# Altium PCB isa_svga.PcbDoc (part 1 of 2)
Units mm, origin at the board's own origin, x right, y up, seen from the top; angles counter-clockwise.
Board outline 104.14 x 87.63 mm, 2 copper layers (Front, Back); 62 components, 153 nets, 436 pads, 95 vias.
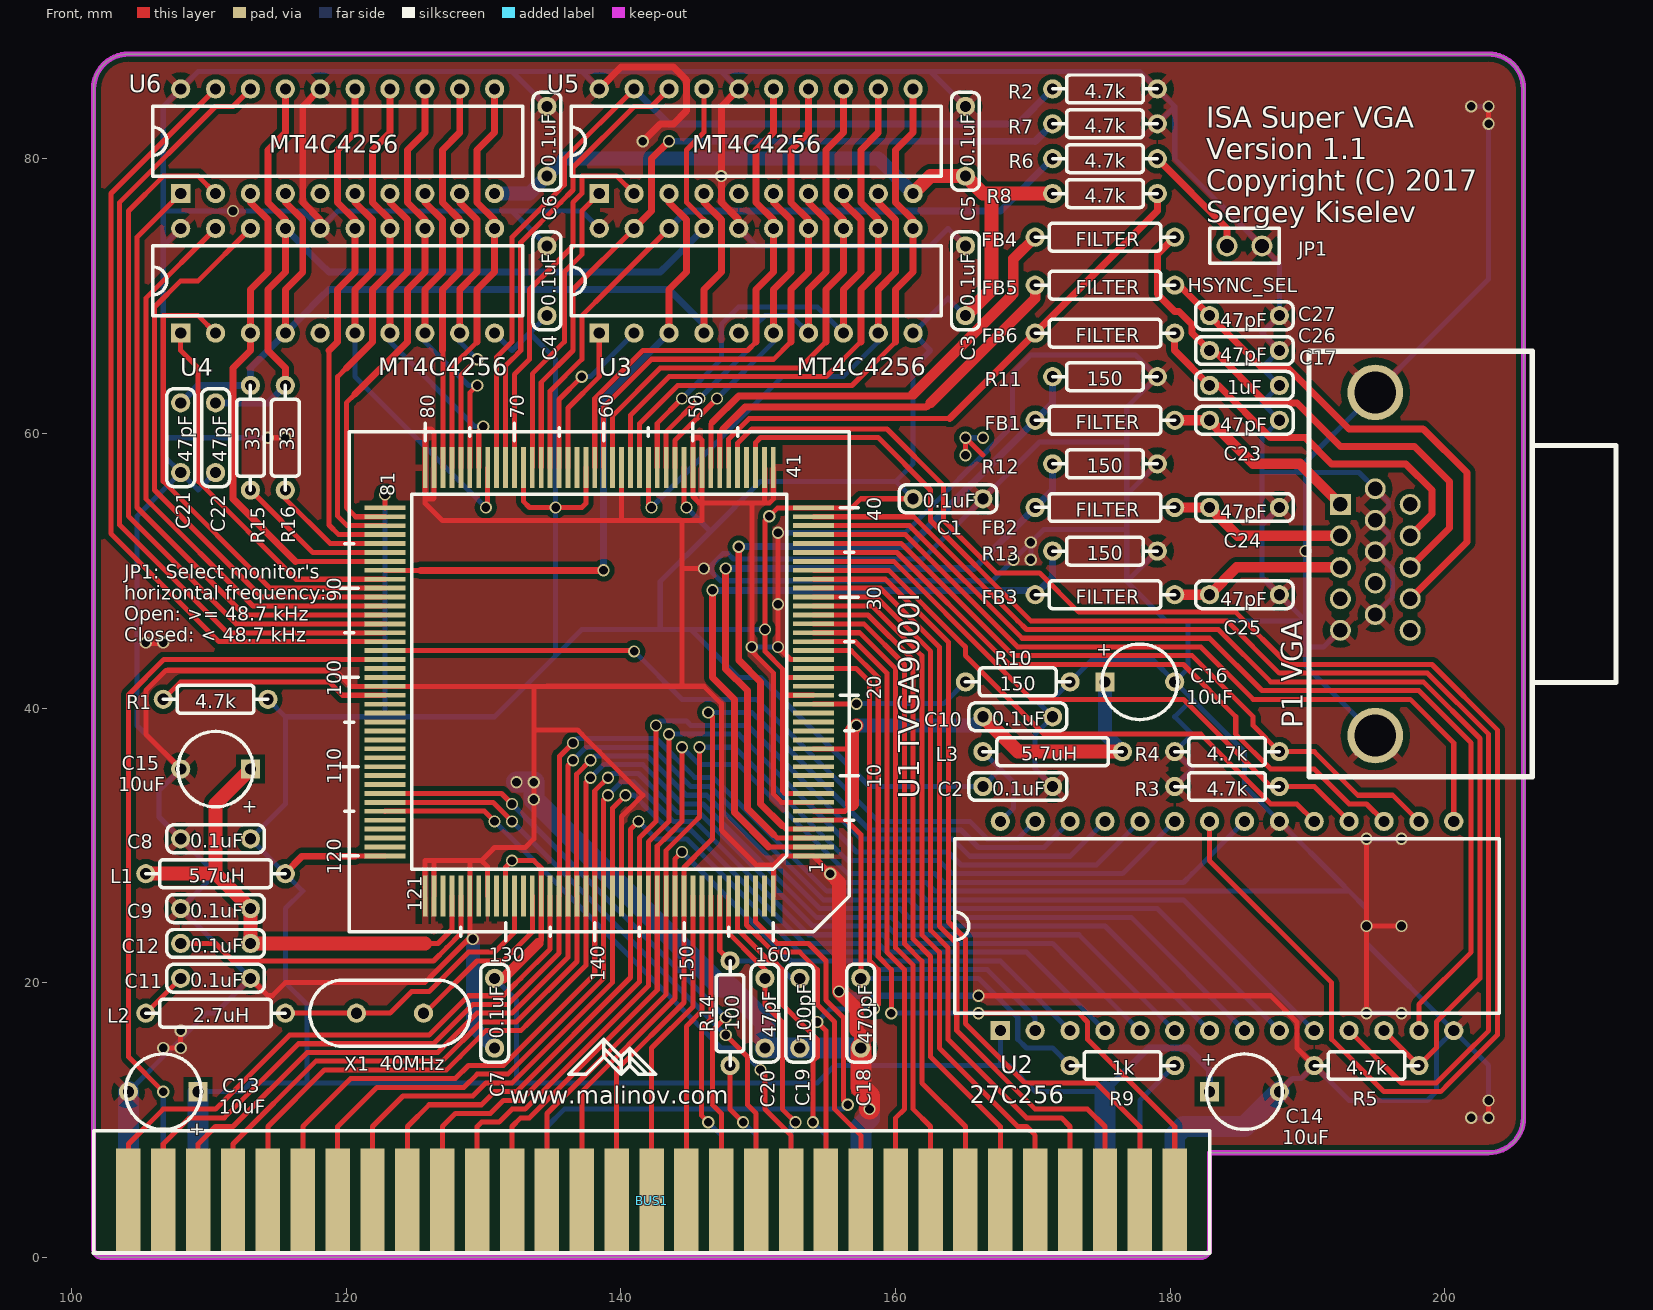
[diagram p0: Front view]
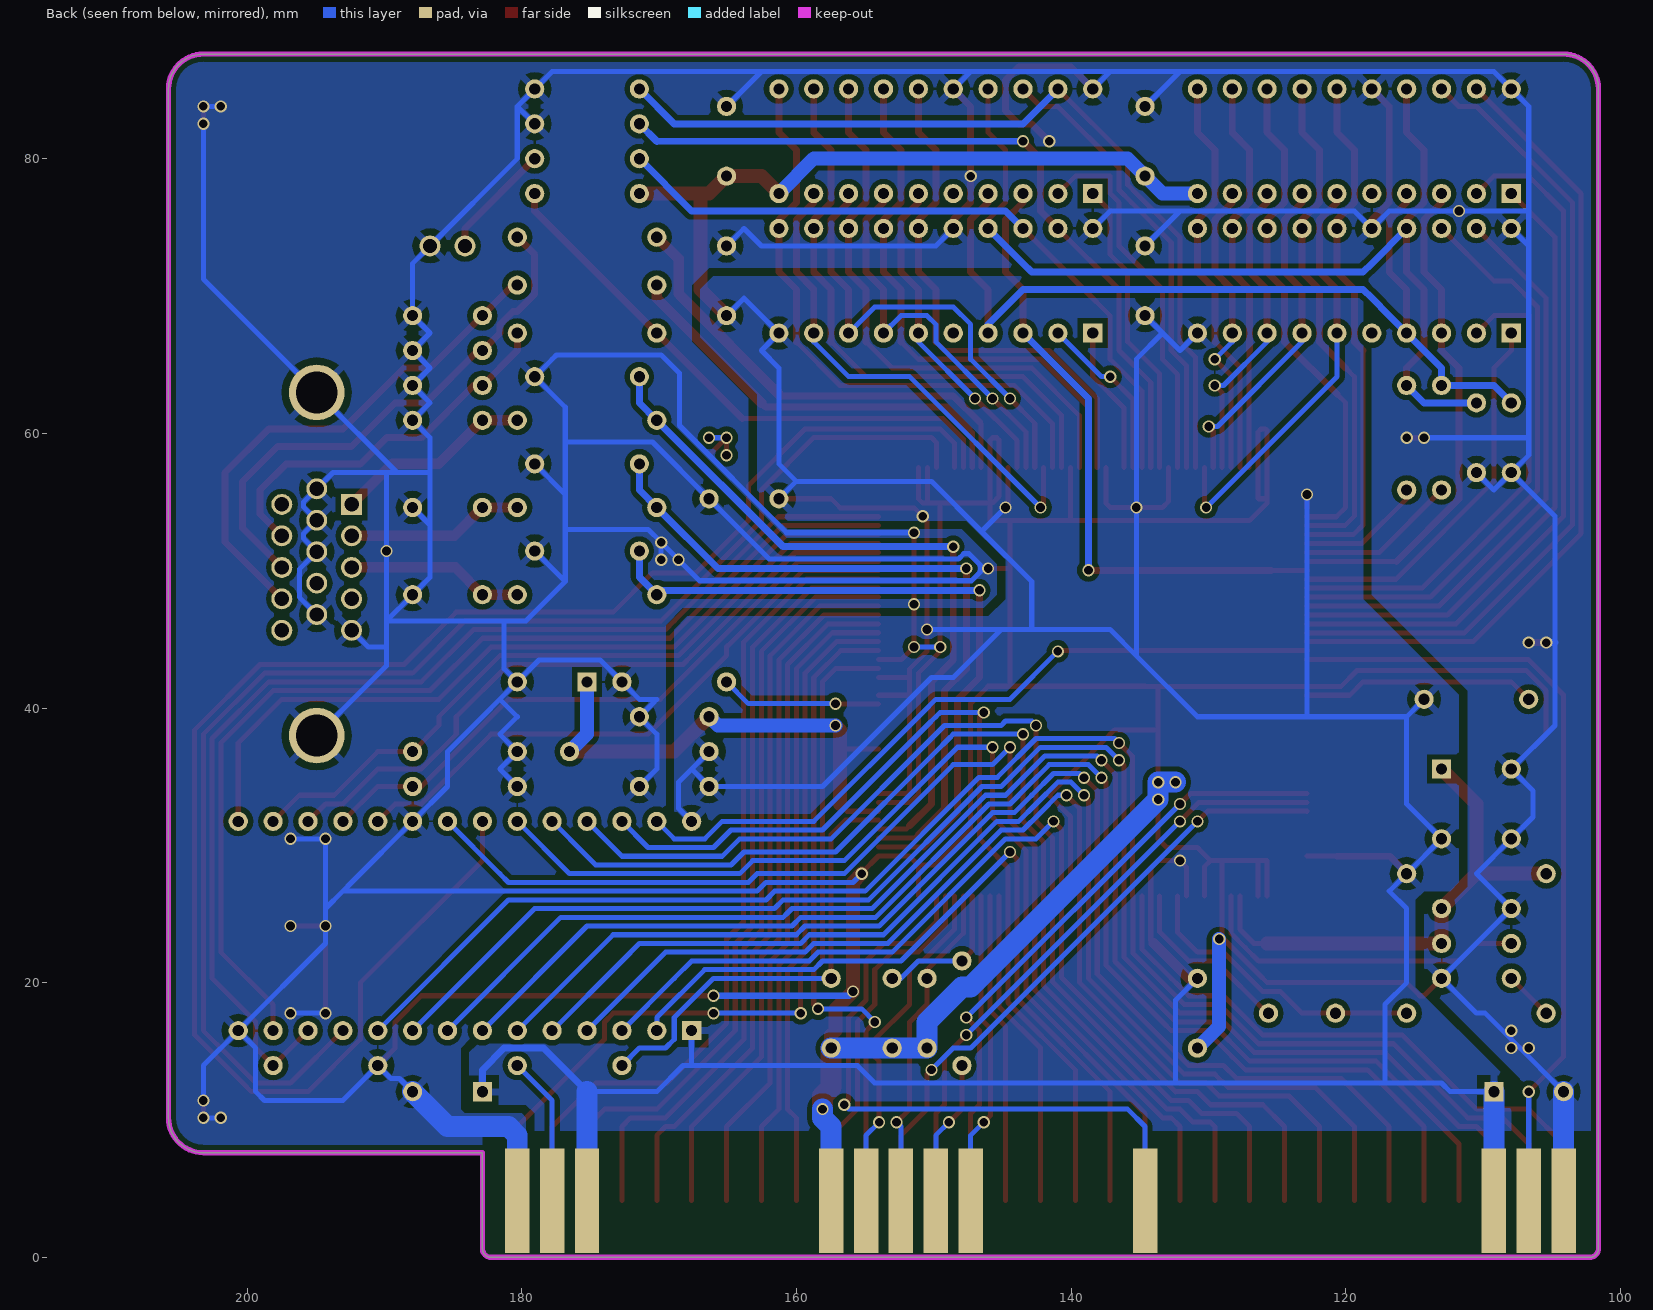
[diagram p1: Back view, seen from below]

## Layer stack, top to bottom
F.Mask: solder mask 0.0102, Solder Resist, Dk 3.5
Front: signal copper 0.0356
Dielectric 1: dielectric 0.32, FR-4, Dk 4.8
Back: signal copper 0.0356
B.Mask: solder mask 0.0102, Solder Resist, Dk 3.5

## Board outline
101.6,0.635 101.6,85.09 cw(c104.14,85.09) 203.2,87.63 cw(c203.2,85.09) 205.74,85.09 205.74,10.16 cw(c203.2,10.16) 203.2,7.62 182.88,7.62 182.88,0.635 cw(c182.245,0.635) 182.245,0 102.235,0 cw(c102.235,0.635) 101.6,0.635

## Design rules (kind name [scope] priority, off if disabled: settings)
Clearance "Clearence 0.37846_Polygon" [InNamedPolygon('Front-GND') OR InNamedPolygon('Back-VCC') OR InNamedPolygon('Back-GND')] p1: gap=0.378 ignorepadtopadclearanceinfootprint=FALSE
Clearance "Clearence 0.254_NetClass" [InNetClass('Default') OR InNetClass('Power')] p2: gap=0.254 ignorepadtopadclearanceinfootprint=FALSE
HoleSize "Hole Size (Default)" [All] p1: absolutevalues=TRUE maxlimit=10 minlimit=0.508 maxpercent=80.000 minpercent=20.000
MinimumSolderMaskSliver [All] p1: minsoldermaskwidth=0
PolygonConnect Polygon_Back-GND_ConnectDirect [IsNamedPolygon('Back-GND') vs IsVia] p1: connectstyle=Direct reliefconductorwidth=0.254 reliefentries=4 polygonreliefangle="90 Angle" airgapwidth=0.254
PolygonConnect Polygon_Back-GND_ConnectRelief45 [IsNamedPolygon('Back-GND') vs (IsThruPin or IsSMTPin) and (PadShape_AllLayers = 'Round')] p2: connectstyle=Relief reliefconductorwidth=0.508 reliefentries=4 polygonreliefangle="45 Angle" airgapwidth=0.508
PolygonConnect Polygon_Back-GND_ConnectRelief90 [IsNamedPolygon('Back-GND') vs (IsThruPin or IsSMTPin) and (PadShape_AllLayers <> 'Round')] p3: connectstyle=Relief reliefconductorwidth=0.508 reliefentries=4 polygonreliefangle="90 Angle" airgapwidth=0.508
PolygonConnect Polygon_Back-VCC_ConnectDirect [IsNamedPolygon('Back-VCC') vs IsVia] p4: connectstyle=Direct reliefconductorwidth=0.254 reliefentries=4 polygonreliefangle="90 Angle" airgapwidth=0.254
PolygonConnect Polygon_Back-VCC_ConnectRelief45 [IsNamedPolygon('Back-VCC') vs (IsThruPin or IsSMTPin) and (PadShape_AllLayers = 'Round')] p5: connectstyle=Relief reliefconductorwidth=0.508 reliefentries=4 polygonreliefangle="45 Angle" airgapwidth=0.508
PolygonConnect Polygon_Back-VCC_ConnectRelief90 [IsNamedPolygon('Back-VCC') vs (IsThruPin or IsSMTPin) and (PadShape_AllLayers <> 'Round')] p6: connectstyle=Relief reliefconductorwidth=0.508 reliefentries=4 polygonreliefangle="90 Angle" airgapwidth=0.508
PolygonConnect Polygon_Front-GND_ConnectDirect [IsNamedPolygon('Front-GND') vs IsVia] p7: connectstyle=Direct reliefconductorwidth=0.254 reliefentries=4 polygonreliefangle="90 Angle" airgapwidth=0.254
PolygonConnect Polygon_Front-GND_ConnectRelief45 [IsNamedPolygon('Front-GND') vs (IsThruPin or IsSMTPin) and (PadShape_AllLayers = 'Round')] p8: connectstyle=Relief reliefconductorwidth=0.508 reliefentries=4 polygonreliefangle="45 Angle" airgapwidth=0.508
PolygonConnect Polygon_Front-GND_ConnectRelief90 [IsNamedPolygon('Front-GND') vs (IsThruPin or IsSMTPin) and (PadShape_AllLayers <> 'Round')] p9: connectstyle=Relief reliefconductorwidth=0.508 reliefentries=4 polygonreliefangle="90 Angle" airgapwidth=0.508
RoutingVias [All] p1: holewidth=0.711 width=1.27 viastyle="Through Hole" minholewidth=0.711 minwidth=1.27 maxholewidth=0.711 maxwidth=1.27
SilkToSilkClearance [All] p1: silktosilkclearance=0
SilkToSolderMaskClearance [IsPad] p1: minsilkscreentomaskgap=0 clearancetoexposedcopper=TRUE
SolderMaskExpansion [All] p1: expansion=0.102 istentingtop=FALSE
Width [All] p1: maxlimit=10 minlimit=0.203 preferedwidth=0.368 minimp=50.000000 maximp=50.000000 favimp=50.000000
26 further rules are at their usual default settings.

## Classes and differential pairs
net class Default: A0 A1 A2 A3 A4 A5 A6 A7 A8 A9 A10 A11 A12 A13 A14 A15 A16 A17 A18 A19 AEN AVDD1 AVDD2 B BLUE C\A\S\ D0 D1 D2 D3 D4 D5 D6 D7 G GND GREEN HSYNC I\O\R\ I\O\W\ IOCHRDY M\E\M\R\ M\E\M\W\ MAA0 MAA1 MAA2 MAA3 MAA4 MAA5 MAA6 MAA7 MAA8 MAB0 MAB1 MAB2 MAB3 MAB4 MAB5 MAB6 MAB7 MAB8 MD0 MD1 MD2 MD3 MD4 MD5 MD6 MD7 MD16 MD17 MD18 MD19 MD20 MD21 MD22 MD23 MONITOR N\M\I\ Net-(C11-Pad1) Net-(C12-Pad2) Net-(C17-Pad1) Net-(C18-Pad1) Net-(C19-Pad1) Net-(C26-Pad1) Net-(C27-Pad1) Net-(JP1-Pad1) Net-(L2-Pad2) Net-(P1-Pad4) Net-(P1-Pad9) Net-(P1-Pad11) Net-(P1-Pad15) Net-(R1-Pad1) Net-(R10-Pad1) Net-(R15-Pad1) Net-(R16-Pad1) Net-(U1-Pad9) Net-(U1-Pad10) Net-(U1-Pad11) Net-(U1-Pad12) Net-(U1-Pad14) Net-(U1-Pad15) Net-(U1-Pad16) Net-(U1-Pad17) Net-(U1-Pad20) Net-(U1-Pad44) Net-(U1-Pad63) Net-(U1-Pad99) Net-(U1-Pad100) Net-(U1-Pad103) Net-(U1-Pad104) Net-(U1-Pad105) Net-(U1-Pad106) Net-(U1-Pad107) Net-(U1-Pad108) Net-(U1-Pad109) Net-(U1-Pad110) Net-(U1-Pad111) Net-(U1-Pad112) Net-(U1-Pad116) Net-(U1-Pad117) Net-(U1-Pad118) Net-(U1-Pad119) Net-(U1-Pad123) Net-(U1-Pad127) Net-(U1-Pad129) Net-(U1-Pad132) Net-(U1-Pad133) Net-(U1-Pad159) Net-(U3-Pad5) Net-(U4-Pad5) Net-(U5-Pad5) Net-(U6-Pad5) OSC R R\A\S\ R\E\F\R\E\S\H\ R\O\M\C\S\ RED RESET RMD0 RMD1 RMD2 RMD3 RMD4 RMD5 RMD6 RMD7 ROMA0 VCC VSYNC W\E\0\ W\E\2\

## Components (designator, comment, footprint, x,y, rotation, side; value= is the part's Value field where it differs from the comment)
BUS1 "BUSPC_DEV" Conn_Bus_ISA8 142.24,4.127 r0 top
C1 "0.1uF" Cap_Cer_504 163.83,55.245 r0 top
C2 "0.1uF" Cap_Cer_504 168.91,34.29 r0 top
C3 "0.1uF" Cap_Cer_504 165.1,71.12 r90 top
C4 "0.1uF" Cap_Cer_504 134.62,71.12 r90 top
C5 "0.1uF" Cap_Cer_504 165.1,81.28 r90 top
C6 "0.1uF" Cap_Cer_504 134.62,81.28 r90 top
C7 "0.1uF" Cap_Cer_504 130.81,17.78 r270 top
C8 "0.1uF" Cap_Cer_504 110.49,30.48 r180 top
C9 "0.1uF" Cap_Cer_504 110.49,25.4 r180 top
C10 "0.1uF" Cap_Cer_504 168.91,39.37 r0 top
C11 "0.1uF" Cap_Cer_504 110.49,20.32 r0 top
C12 "0.1uF" Cap_Cer_504 110.49,22.86 r180 top
C13 "10uF" Cap_Tant_504 106.68,12.065 r180 top
C14 "10uF" Cap_Tant_504 185.42,12.065 r0 top
C15 "10uF" Cap_Tant_504 110.49,35.56 r180 top
C16 "10uF" Cap_Tant_504 177.8,41.91 r0 top
C17 "1uF" Cap_Cer_504 185.42,63.5 r0 top
C18 "470pF" Cap_Cer_504 157.48,17.78 r270 top
C19 "100pF" Cap_Cer_504 153.035,17.78 r270 top
C20 "47pF" Cap_Cer_504 150.495,17.78 r270 top
C21 "47pF" Cap_Cer_504 107.95,59.69 r270 top
C22 "47pF" Cap_Cer_504 110.49,59.69 r270 top
C23 "47pF" Cap_Cer_504 185.42,60.96 r0 top
C24 "47pF" Cap_Cer_504 185.42,54.61 r0 top
C25 "47pF" Cap_Cer_504 185.42,48.26 r0 top
C26 "47pF" Cap_Cer_504 185.42,66.04 r0 top
C27 "47pF" Cap_Cer_504 185.42,68.58 r0 top
FB1 "FILTER" Res_1016 175.26,60.96 r0 top
FB2 "FILTER" Res_1016 175.26,54.61 r0 top
FB3 "FILTER" Res_1016 175.26,48.26 r0 top
FB4 "FILTER" Res_1016 175.26,74.295 r180 top
FB5 "FILTER" Res_1016 175.26,70.802 r180 top
FB6 "FILTER" Res_1016 175.26,67.31 r180 top
JP1 "HSYNC_SEL" Conn_Pin_Header_2x1_Nokey 185.42,73.66 r0 top
L1 "5.7uH" Res_1016 110.49,27.94 r180 top
L2 "2.7uH" Res_1016 110.49,17.78 r0 top
L3 "5.7uH" Res_1016 171.45,36.83 r0 top
P1 "VGA" Conn_Dsub_DE15F 194.945,50.495 r270 top
R1 "4.7k" Res_762 110.49,40.64 r0 top
R2 "4.7k" Res_762 175.26,85.09 r0 top
R3 "4.7k" Res_762 184.15,34.29 r180 top
R4 "4.7k" Res_762 184.15,36.83 r180 top
R5 "4.7k" Res_762 194.31,13.97 r180 top
R6 "4.7k" Res_762 175.26,80.01 r0 top
R7 "4.7k" Res_762 175.26,82.55 r0 top
R8 "4.7k" Res_762 175.26,77.47 r180 top
R9 "1k" Res_762 176.53,13.97 r180 top
R10 "150" Res_762 168.91,41.91 r0 top
R11 "150" Res_762 175.26,64.135 r0 top
R12 "150" Res_762 175.26,57.785 r0 top
R13 "150" Res_762 175.26,51.435 r0 top
R14 "100" Res_762 147.955,17.78 r90 top
R15 "33" Res_762 113.03,59.69 r90 top
R16 "33" Res_762 115.57,59.69 r90 top
U1 "TVGA9000I" PQFP-160 138.43,41.91 r90 top
U2 "27C256" DIP28_600 184.15,24.13 r0 top
U3 "MT4C4256" DIP20_300 149.86,71.12 r0 top
U4 "MT4C4256" DIP20_300 119.38,71.12 r0 top
U5 "MT4C4256" DIP20_300 149.86,81.28 r0 top
U6 "MT4C4256" DIP20_300 119.38,81.28 r0 top
X1 "40MHz" Crystal_HC-49U_Vert 123.19,17.78 r180 top

## Footprints (in the part's own frame and the unit in brackets; to place one, negate y for a bottom-side part, rotate by r counter-clockwise, add the part's x,y. Pads: shape width x height; smd on the part's side, far side on the other; paste and mask are expansions set on the pad)
Cap_Cer_504 [mil]
  round 55 hole 32 paste-55 mask+10: 1(-100,0) 2(100,0)
  silkscreen extent -140,-40 140,40
Cap_Tant_504 [mil]
  rect 55x55 hole 32 paste-55 mask+10: 1(-100,0)
  round 55 hole 32 paste-55 mask+10: 2(100,0)
  silkscreen extent -108,-108 108,108
Conn_Bus_ISA8 [mil]
  rect 70x300 smd far side paste-300 mask+10: 1(1500,0) 2(1400,0) 3(1300,0) 10(600,0) 11(500,0) 12(400,0) 13(300,0) 14(200,0) 19(-300,0) 29(-1300,0) 30(-1400,0) 31(-1500,0)
  rect 70x300 smd paste-300 mask+10: 32(1500,0) 33(1400,0) 34(1300,0) 35(1200,0) 36(1100,0) 37(1000,0) 38(900,0) 39(800,0) 40(700,0) 41(600,0) 42(500,0) 43(400,0) 44(300,0) 45(200,0) 46(100,0) 47(0,0) 48(-100,0) 49(-200,0) 50(-300,0) 51(-400,0) 52(-500,0) 53(-600,0) 54(-700,0) 55(-800,0) 56(-900,0) 57(-1000,0) 58(-1100,0) 59(-1200,0) 60(-1300,0) 61(-1400,0) 62(-1500,0)
  silkscreen extent -1600,-150 1600,200
Conn_Dsub_DE15F [mil]
  rect 60x60 hole 41 paste-60 mask+10: 1(-170.9,-100)
  round 60 hole 41 paste-60 mask+10: 2(-80.7,-100) 3(9.8,-100) 4(100,-100) 5(190.2,-100) 6(-215.6,0) 7(-125.4,0) 8(-35.2,0) 9(54.9,0) 10(145.1,0) 11(-170.9,100) 12(-80.7,100) 13(9.8,100) 14(100,100) 15(190.2,100)
  round 159.4 hole 120.1 paste-159.4 mask+10: Un1(491.9,0) Un2(-491.9,0)
  silkscreen extent -610,-190 610,690
Conn_Pin_Header_2x1_Nokey [mil]
  rrect100% 60x60 hole 40 paste-60 mask+10: 1(-50,0)
  round 60 hole 40 paste-60 mask+10: 2(50,0)
  silkscreen extent -100,-50 100,50
Crystal_HC-49U_Vert [mil]
  round 55 hole 32 paste-55 mask+10: 1(-96.1,0) 2(96.1,0)
  silkscreen extent -230,-95 230,95
DIP20_300 [mil]
  rect 55x55 hole 32 paste-55 mask+10: 1(-450,-150)
  round 55 hole 32 paste-55 mask+10: 2(-350,-150) 3(-250,-150) 4(-150,-150) 5(-50,-150) 6(50,-150) 7(150,-150) 8(250,-150) 9(350,-150) 10(450,-150) 11(450,150) 12(350,150) 13(250,150) 14(150,150) 15(50,150) 16(-50,150) 17(-150,150) 18(-250,150) 19(-350,150) 20(-450,150)
  silkscreen extent -530,-100 530,100
DIP28_600 [mil]
  rect 55x55 hole 32 paste-55 mask+10: 1(-650,-300)
  round 55 hole 32 paste-55 mask+10: 2(-550,-300) 3(-450,-300) 4(-350,-300) 5(-250,-300) 6(-150,-300) 7(-50,-300) 8(50,-300) 9(150,-300) 10(250,-300) 11(350,-300) 12(450,-300) 13(550,-300) 14(650,-300) 15(650,300) 16(550,300) 17(450,300) 18(350,300) 19(250,300) 20(150,300) 21(50,300) 22(-50,300) 23(-150,300) 24(-250,300) 25(-350,300) 26(-450,300) 27(-550,300) 28(-650,300)
  silkscreen extent -780,-250 780,250
PQFP-160 [mil]
  rect 13.8x118.1 smd mask+10: 1(-499,-614.2) 2(-473.4,-614.2) 3(-447.8,-614.2) 4(-422.2,-614.2) 5(-396.6,-614.2) 6(-371,-614.2) 7(-345.4,-614.2) 8(-319.9,-614.2) 9(-294.3,-614.2) 10(-268.7,-614.2) 11(-243.1,-614.2) 12(-217.5,-614.2) 13(-191.9,-614.2) 14(-166.3,-614.2) 15(-140.7,-614.2) 16(-115.1,-614.2) 17(-89.5,-614.2) 18(-63.9,-614.2) 19(-38.4,-614.2) 20(-12.8,-614.2) 21(12.8,-614.2) 22(38.4,-614.2) 23(64,-614.2) 24(89.6,-614.2) 25(115.2,-614.2) 26(140.8,-614.2) 27(166.4,-614.2) 28(192,-614.2) 29(217.5,-614.2) 30(243.1,-614.2) 31(268.7,-614.2) 32(294.3,-614.2) 33(319.9,-614.2) 34(345.5,-614.2) 35(371.1,-614.2) 36(396.7,-614.2) 37(422.3,-614.2) 38(447.9,-614.2) 39(473.5,-614.2) 40(499,-614.2) 81(499,614.2) 82(473.4,614.2) 83(447.8,614.2) 84(422.2,614.2) 85(396.6,614.2) 86(371.1,614.2) 87(345.5,614.2) 88(319.9,614.2) 89(294.3,614.2) 90(268.7,614.2) 91(243.1,614.2) 92(217.5,614.2) 93(191.9,614.2) 94(166.3,614.2) 95(140.7,614.2) 96(115.2,614.2) 97(89.6,614.2) 98(64,614.2) 99(38.4,614.2) 100(12.8,614.2) 101(-12.8,614.2) 102(-38.4,614.2) 103(-64,614.2) 104(-89.6,614.2) 105(-115.2,614.2) 106(-140.8,614.2) 107(-166.3,614.2) 108(-191.9,614.2) 109(-217.5,614.2) 110(-243.1,614.2) 111(-268.7,614.2) 112(-294.3,614.2) 113(-319.9,614.2) 114(-345.5,614.2) 115(-371.1,614.2) 116(-396.7,614.2) 117(-422.2,614.2) 118(-447.8,614.2) 119(-473.4,614.2) 120(-499,614.2)
  rect 118.1x13.8 smd mask+10: 41(614.2,-499) 42(614.2,-473.4) 43(614.2,-447.8) 44(614.2,-422.2) 45(614.2,-396.7) 46(614.2,-371.1) 47(614.2,-345.5) 48(614.2,-319.9) 49(614.2,-294.3) 50(614.2,-268.7) 51(614.2,-243.1) 52(614.2,-217.5) 53(614.2,-191.9) 54(614.2,-166.3) 55(614.2,-140.8) 56(614.2,-115.2) 57(614.2,-89.6) 58(614.2,-64) 59(614.2,-38.4) 60(614.2,-12.8) 61(614.2,12.8) 62(614.2,38.4) 63(614.2,64) 64(614.2,89.6) 65(614.2,115.2) 66(614.2,140.8) 67(614.2,166.3) 68(614.2,191.9) 69(614.2,217.5) 70(614.2,243.1) 71(614.2,268.7) 72(614.2,294.3) 73(614.2,319.9) 74(614.2,345.5) 75(614.2,371.1) 76(614.2,396.7) 77(614.2,422.2) 78(614.2,447.8) 79(614.2,473.4) 80(614.2,499) 121(-614.2,499) 122(-614.2,473.4) 123(-614.2,447.8) 124(-614.2,422.2) 125(-614.2,396.7) 126(-614.2,371.1) 127(-614.2,345.5) 128(-614.2,319.9) 129(-614.2,294.3) 130(-614.2,268.7) 131(-614.2,243.1) 132(-614.2,217.5) 133(-614.2,191.9) 134(-614.2,166.3) 135(-614.2,140.8) 136(-614.2,115.2) 137(-614.2,89.6) 138(-614.2,64) 139(-614.2,38.4) 140(-614.2,12.8) 141(-614.2,-12.8) 142(-614.2,-38.4) 143(-614.2,-64) 144(-614.2,-89.6) 145(-614.2,-115.2) 146(-614.2,-140.7) 147(-614.2,-166.3) 148(-614.2,-191.9) 149(-614.2,-217.5) 150(-614.2,-243.1) 151(-614.2,-268.7) 152(-614.2,-294.3) 153(-614.2,-319.9) 154(-614.2,-345.5) 155(-614.2,-371.1) 156(-614.2,-396.6) 157(-614.2,-422.2) 158(-614.2,-447.8) 159(-614.2,-473.4) 160(-614.2,-499)
  silkscreen extent -742,-742 742,742
Res_762 [mil]
  round 55 hole 32 paste-55 mask+10: 1(-150,0) 2(150,0)
  silkscreen extent -150,-40 150,40
Res_1016 [mil]
  round 55 hole 32 paste-55 mask+10: 1(-200,0) 2(200,0)
  silkscreen extent -200,-40 200,40

## Part data
BUS1: library part Conn_Bus_ISA8, "ISA8 PCB edge connector"
C1 C2 C3 C4 C5 C6 C7 C8 C9 C10 C11 C12 C17 C18 C19 C20 C21 C22 C23 C24 C25 C26 C27: library part Cap_Cer_504, "Ceramic Capacitor 5.04mm"
C13 C14 C15 C16: library part Cap_Tant_504, "Tantalum Capacitor - 5.04mm"
FB1 FB2 FB3 FB4 FB5 FB6 L1 L2 L3: library part Res_1016, "Resistor 10.16mm between leads"
JP1: library part Conn_Pin_Header_2x1_Nokey, "Connector Pin Header 2x1 No Key"
P1: library part Conn_Dsub_DE15F, "Connector DE15 Female Right Angle Through Hole"
R1 R2 R3 R4 R5 R6 R7 R8 R9 R10 R11 R12 R13 R14 R15 R16: library part Res_762, "Resitance 3 pas"
U1: library part PQFP-160
U2: library part DIP28_600, "Module Dil 28 pins, pads ronds, e=600 mils"
U3 U4 U5 U6: library part DIP20_300, "20 pins DIL package, round pads"
X1: library part Crystal_HC-49U_Vert, "Quartz Crystal HC-49U Vertical"

## Via types
v1: diameter 0.889, hole 0.635, Front to Back, tented both sides, 95 vias

## Nets (pads, with @x,y where several pads share a name; then routed paths per layer and width w, separated by ;. In a path a pad name is that pad's centre, name@x,y a point inside that pad or via, vN(x,y) a via of type N, cw(c..) or ccw(c..) an arc to the next point about the centre after c; other vN are vias at no path point)
A0: BUS1.62 U1.135 | length 44.6
  Front w0.368: BUS1.62@104.14,4.127 104.14,8.255 106.68,10.795 110.49,10.795 115.887,16.192 125.412,16.192 126.047,16.192 128.905,19.05 131.445,19.05 132.08,19.685 132.715,20.32 134.854,22.459 134.854,24.447 U1.135@134.854,26.309
A1: BUS1.61 U1.136 U2.10 | length 120.2
  Front w0.368: BUS1.61@106.68,4.127 106.68,8.255 108.585,10.16 111.125,10.16 116.522,15.557 125.73,15.557 126.365,15.557 129.222,18.415 131.445,18.415 131.445,18.42 131.768,18.42 132.715,19.367 133.35,20.002 135.504,22.156 U1.136@135.504,26.309 ; 135.504,23.49 135.504,23.495 U1.136@135.504,26.309 ; v1(136.525,37.465) 135.572,36.512 135.524,36.512 135.524,34.242 135.524,26.309 U1.136@135.504,26.309
  Back w0.368: v1(136.525,37.465) 136.843,37.782 142.558,37.782 145.385,34.955 146.718,34.955 155.004,26.67 155.194,26.67 160.66,26.67 ; U2.10@190.5,16.51 180.975,26.035 162.232,26.035 162.232,26.03 161.607,26.655 161.607,26.665 161.607,26.67 160.66,26.67 ; 160.66,26.67 160.66,26.675 160.66,26.67
A2: BUS1.60 U1.137 U2.9 | length 111.9
  Front w0.368: BUS1.60@109.22,4.127 109.22,8.255 110.49,9.525 111.76,9.525 117.157,14.922 125.412,14.922 126.677,14.922 129.535,17.78 ; v1(136.525,36.195) 136.154,35.824 136.154,35.242 136.154,33.919 U1.137@136.154,26.309 136.154,24.447 136.154,21.854 132.08,17.78 129.535,17.78 ; 129.535,17.78 129.535,17.785 129.535,17.78
  Back w0.368: v1(136.525,36.195) 137.472,37.142 142.24,37.142 142.245,37.142 145.097,34.29 146.494,34.29 154.749,26.035 160.02,26.035 ; 179.08,25.395 179.075,25.4 179.07,25.4 ; U2.9@187.96,16.51 187.96,16.515 179.07,25.405 179.07,25.4 ; 160.02,26.035 160.338,26.035 ; 160.02,26.035 160.972,26.035 161.607,25.4 179.07,25.4 ; 160.338,26.035 160.338,26.03 160.338,26.035
A3: BUS1.59 U1.138 U2.8 | length 105.8
  Front w0.368: BUS1.59@111.76,4.127 111.76,8.255 111.76,8.26 117.79,14.29 127.003,14.29 129.857,17.145 130.493,17.145 130.493,17.15 132.403,17.15 136.804,21.552 136.804,21.907 136.804,22.86 U1.138@136.804,26.309 136.784,26.309 136.784,33.597 136.784,34.608 136.784,35.184 v1(137.795,36.195)
  Back w0.368: v1(137.795,36.195) 138.112,36.512 141.922,36.512 144.78,33.655 146.24,33.655 146.304,33.591 154.495,25.4 160.02,25.4 160.338,25.4 160.655,25.082 160.972,24.765 177.165,24.765 U2.8@185.42,16.51
A4: BUS1.58 U1.139 U2.7 | length 100.7
  Front w0.368: BUS1.58@114.3,4.127 114.3,9.525 118.427,13.652 127.317,13.652 128.27,14.605 130.175,16.51 132.715,16.51 133.35,17.145 137.455,21.25 137.455,21.907 U1.139@137.455,26.309 137.475,26.309 137.475,33.02 137.475,33.972 137.475,34.605 v1(137.795,34.925)
  Back w0.368: v1(137.795,34.925) 138.748,35.877 141.605,35.877 143.192,34.29 144.463,33.02 145.987,33.02 154.242,24.765 159.702,24.765 159.702,24.76 160.332,24.13 175.26,24.13 U2.7@182.88,16.51
A5: BUS1.57 U1.140 U2.6 | length 95.1
  Front w0.368: BUS1.57@116.84,4.127 116.84,9.525 120.332,13.018 127.953,13.018 128.905,13.97 131.445,13.97 138.105,20.63 138.105,22.225 U1.140@138.105,26.309 138.105,32.385 138.105,33.972 138.112,33.972 v1(139.065,34.925)
  Back w0.368: v1(139.065,34.925) 139.382,35.242 141.287,35.242 142.875,33.655 144.145,32.385 145.732,32.385 153.987,24.13 154.623,24.13 159.385,24.13 160.02,23.495 173.355,23.495 U2.6@180.34,16.51
A6: BUS1.56 U1.141 U2.5 | length 90
  Front w0.368: BUS1.56@119.38,4.127 119.38,9.525 122.237,12.383 128.588,12.383 129.54,13.335 129.54,13.34 131.768,13.34 138.755,20.328 U1.141@138.755,26.309 138.755,31.75 ; 138.755,32.393 138.755,32.385 138.755,31.75 ; v1(139.065,33.655) 138.755,33.345 138.755,33.337 138.755,31.75
  Back w0.368: v1(139.065,33.655) 140.017,34.608 140.97,34.608 142.558,33.02 143.827,31.75 145.415,31.75 153.67,23.495 154.305,23.495 154.94,23.495 159.067,23.495 159.702,22.86 171.45,22.86 172.72,21.59 U2.5@177.8,16.51
A7: BUS1.55 U1.142 U2.4 | length 83.3
  Front w0.368: BUS1.55@121.92,4.127 121.92,9.525 124.142,11.747 129.222,11.747 130.175,12.7 130.175,12.71 132.09,12.71 139.405,20.025 139.405,20.637 139.405,21.273 U1.142@139.405,26.309 139.405,31.75 139.405,32.067 ; 139.405,32.09 139.405,32.067 ; 139.405,32.408 139.405,32.385 ; v1(140.335,33.655) 139.405,32.725 139.405,32.385 ; 139.405,32.067 139.405,32.385
  Back w0.368: v1(140.335,33.655) 140.97,33.655 142.24,32.385 143.51,31.115 145.097,31.115 153.352,22.86 153.987,22.86 154.305,22.86 158.75,22.86 158.75,22.855 159.38,22.225 169.545,22.225 170.815,20.955 U2.4@175.26,16.51
A8: BUS1.54 U1.144 U2.3 | length 75.5
  Front w0.368: BUS1.54@124.46,4.127 124.46,9.525 126.047,11.112 129.857,11.112 130.81,12.065 132.398,12.065 ; v1(141.287,31.75) 140.706,31.168 140.706,29.21 U1.144@140.706,26.309 140.706,20.955 140.706,20.373 132.398,12.065 ; 132.398,12.065 132.398,12.06 132.398,12.065
  Back w0.368: v1(141.287,31.75) 142.558,30.48 144.78,30.48 153.035,22.225 153.67,22.225 158.433,22.225 159.067,21.59 167.64,21.59 168.91,20.32 U2.3@172.72,16.51
A9: BUS1.53 U1.145 U2.25 | length 81.2
  Front w0.368: BUS1.53@127,4.127 127,9.525 127.953,10.477 130.493,10.477 131.445,11.43 132.715,11.43 141.287,20.002 141.356,20.071 U1.145@141.356,26.309 141.356,28.892 141.356,30.549 142.558,31.75 142.558,38.1 142.558,38.417 v1(142.558,38.735)
  Back w0.368: v1(142.558,38.735) 142.875,39.052 144.78,39.052 145.097,38.735 149.225,38.735 150.177,37.782 157.48,30.48 164.147,30.48 165.417,29.21 172.72,29.21 173.355,29.845 U2.25@175.26,31.75
A10: BUS1.52 U1.146 U2.24 | length 80.6
  Front w0.368: BUS1.52@129.54,4.127 129.54,9.525 129.857,9.842 131.127,9.842 132.085,10.8 133.038,10.8 142.004,19.766 142.004,20.002 U1.146@142.004,26.309 142.004,29.845 142.004,30.244 143.51,31.75 143.51,37.465 v1(143.51,38.1)
  Back w0.368: v1(143.51,38.1) 148.59,38.1 148.907,37.782 149.86,36.83 157.162,29.527 163.83,29.527 164.782,28.575 174.625,28.575 175.26,29.21 U2.24@177.8,31.75
A11: BUS1.51 U1.147 U2.21 | length 85.4
  Front w0.368: BUS1.51@132.08,4.127 132.08,9.525 132.715,10.16 133.35,10.16 142.654,19.464 142.654,20.32 142.654,20.637 U1.147@142.654,26.309 142.654,29.845 142.654,29.942 143.51,30.797 144.463,31.75 v1(144.463,37.148)
  Back w0.368: v1(144.463,37.148) 145.732,35.877 148.59,35.877 156.528,27.94 161.29,27.94 162.877,27.94 163.512,27.305 180.975,27.305 181.61,27.94 U2.21@185.42,31.75
A12: BUS1.50 U1.148 U2.23 | length 77.6
  Front w0.368: BUS1.50@134.62,4.127 134.62,8.89 134.62,10.477 143.304,19.162 143.304,21.273 U1.148@143.304,26.309 143.304,28.575 143.304,29.21 143.304,29.639 144.145,30.48 145.415,31.75 145.732,32.067 v1(145.732,37.148)
  Back w0.368: v1(145.732,37.148) 148.273,37.148 156.528,28.892 163.195,28.892 164.147,27.94 164.465,27.94 176.53,27.94 U2.23@180.34,31.75
A13: BUS1.49 U1.149 U2.2 | length 60.1
  Front w0.368: BUS1.49@137.16,4.127 137.16,9.525 137.16,12.065 143.954,18.86 143.954,20.32 U1.149@143.954,26.309 143.954,29.019 144.145,29.21 v1(144.463,29.527)
  Back w0.368: v1(144.463,29.527) 152.4,21.59 158.115,21.59 158.75,20.955 166.688,20.955 170.18,17.462 U2.2@170.18,16.51
A14: BUS1.48 U1.150 U2.26 | length 69.8
  Front w0.368: BUS1.48@139.7,4.127 139.7,9.525 139.7,10.795 139.7,13.652 144.605,18.557 144.605,19.367 U1.150@144.605,26.309 144.605,28.4 144.78,28.575 146.05,29.845 146.685,30.48 146.685,39.37 v1(146.368,39.688)
  Back w0.368: v1(146.368,39.688) 149.542,39.688 149.86,39.37 150.495,38.735 158.115,31.115 164.782,31.115 166.052,29.845 170.815,29.845 U2.26@172.72,31.75
A15: BUS1.47 U1.151 | length 23.4
  Front w0.368: BUS1.47@142.24,4.127 142.24,15.24 145.255,18.255 145.255,20.637 U1.151@145.255,26.309
A16: BUS1.46 U1.152 | length 22.6
  Front w0.368: BUS1.46@144.78,4.127 144.78,9.525 144.78,10.16 144.78,13.335 144.78,16.828 145.905,17.953 U1.152@145.905,26.309
A17: BUS1.45 U1.113 | length 45.6
  Front w0.368: U1.113@122.829,33.785 131.315,33.785 v1(132.08,33.02) ; BUS1.45@147.32,4.127 147.32,10.477 146.685,11.112 146.685,16.51 v1(147.637,17.462)
  Back w0.368: v1(132.08,33.02) v1(147.637,17.462)
A18: BUS1.44 U1.114 | length 44.8
  Front w0.368: U1.114@122.829,33.134 130.696,33.134 v1(132.08,31.75) ; v1(147.637,16.192) 149.225,14.605 149.225,11.112 149.86,10.477 BUS1.44@149.86,4.127
  Back w0.368: v1(132.08,31.75) v1(147.637,16.192)
A19: BUS1.43 U1.115 | length 47
  Front w0.368: v1(130.81,31.75) 130.056,32.504 U1.115@122.829,32.504 ; v1(150.177,13.652) 150.495,13.335 150.495,10.795 152.4,8.89 BUS1.43@152.4,4.127 ; U1.115@122.829,32.504 U1.115@122.829,32.484 U1.115@122.829,32.504
  Back w0.368: v1(130.81,31.75) 147.32,15.24 148.59,15.24 ; 149.542,14.287 148.59,15.24 ; v1(150.177,13.652) 148.59,15.24
AEN: BUS1.42 U1.22 | length 46.8
  Front w0.368: U1.22@154.031,42.885 155.892,42.885 ; v1(154.305,17.145) 154.94,16.51 154.94,16.192 BUS1.42@154.94,4.127 ; 156.187,42.885 155.892,42.885 ; v1(158.433,18.098) 158.75,18.415 158.75,20.955 158.115,21.59 158.115,41.91 157.14,42.885 156.21,42.885 155.892,42.885
  Back w0.368: v1(154.305,17.145) 155.257,18.098 v1(158.433,18.098)
AVDD1: C9.1 C12.1 C15.1 L1.2 U1.124 | length 48.6
  Front w0.368: L1.2@105.41,27.94 110.49,27.94 ; 110.49,33.02 C15.1@113.03,35.56 ; C12.1@113.03,22.86 C9.1@113.03,25.4 ; 125.73,22.86 126.682,22.86 127.706,23.884 U1.124@127.706,26.309
  Front w1.016: L1.2@105.41,27.94 110.49,27.94 ; C15.1@113.03,35.56 110.49,33.02 110.49,27.94 ; 125.73,22.86 C12.1@113.03,22.86 C9.1@113.03,25.4 110.49,27.94
AVDD2: C10.1 C16.1 L3.2 U1.6 U1.13 | length 45.5
  Front w0.368: U1.6@154.031,32.487 156.312,32.487 156.845,33.02 156.845,33.655 156.845,33.972 ; U1.13@154.031,37.036 156.733,37.036 156.845,37.148 ; 156.845,34.29 156.845,33.972 ; 156.845,38.417 156.845,37.148 ; 156.845,33.972 156.845,37.148
  Front w1.016: 156.845,33.02 156.845,38.417 v1(157.162,38.735) ; C10.1@166.37,39.37 168.91,36.83 L3.2@176.53,36.83
  Back w0.368: 175.26,38.1 L3.2@176.53,36.83
  Back w1.016: v1(157.162,38.735) 165.735,38.735 C10.1@166.37,39.37 ; C16.1@175.26,41.91 175.26,38.1 L3.2@176.53,36.83
B: FB3.1 R13.1 U1.2 | length 51
  Front w0.368: 150.772,29.886 151.765,29.886 U1.2@154.031,29.886
  Front w0.505: 146.685,42.227 v1(146.685,48.578)
  Front w0.508: 146.685,42.227 148.273,40.64 148.273,33.337 148.273,32.385 150.772,29.886
  Back w0.508: v1(146.685,48.578) 169.862,48.578 FB3.1@170.18,48.26 171.45,49.53 R13.1@171.45,51.435
BLUE: C25.1 FB3.2 P1.3 | length 12.9
  Front w0.762: FB3.2@180.34,48.26 C25.1@182.88,48.26 184.866,50.246 P1.3@192.405,50.246
C\A\S\: C22.1 R16.2 U3.17 U4.17 U5.17 U6.17 | length 73.6
  Front w0.368: U4.17@115.57,74.93 U4.17@115.57,75.565 ; U3.17@146.05,74.93 146.05,75.565 144.78,76.835 144.78,80.645 146.05,81.915 U5.17@146.05,85.09
  Front w0.505: R16.2@115.57,63.5 115.57,64.77 114.3,66.04 114.3,70.485 115.57,71.755 U4.17@115.57,74.93 ; U4.17@115.57,75.565 114.3,76.835 114.3,80.645 115.57,81.915 U6.17@115.57,85.09
  Back w0.505: C22.1@110.49,62.23 114.3,62.23 R16.2@115.57,63.5 ; U4.17@115.57,74.93 118.11,72.39 118.745,71.755 142.875,71.755 143.51,72.39 U3.17@146.05,74.93
D0: BUS1.40 U1.25 | length 45.5
  Front w0.368: U1.25@154.031,44.836 157.094,44.836 159.385,42.545 159.385,22.225 160.655,20.955 160.655,10.795 160.02,10.16 BUS1.40@160.02,4.127
D1: BUS1.39 U1.26 | length 46.9
  Front w0.368: U1.26@154.031,45.486 156.21,45.486 157.396,45.486 160.02,42.862 160.02,22.543 161.29,21.273 161.29,10.795 162.56,9.525 BUS1.39@162.56,4.127
D2: BUS1.38 U1.27 | length 53.2
  Front w0.368: U1.27@154.031,46.137 156.528,46.137 157.698,46.137 160.655,43.18 160.655,22.835 161.925,21.565 161.925,12.7 165.1,9.525 ; BUS1.38@165.1,4.127 165.1,9.525 ; 161.925,12.695 161.92,12.695 161.925,12.695 ; 161.925,12.695 165.095,9.525 165.1,9.525
D3: BUS1.37 U1.28 | length 50.6
  Front w0.368: U1.28@154.031,46.787 156.528,46.787 158.001,46.787 161.29,43.497 161.29,23.177 162.56,21.907 162.56,14.605 ; BUS1.37@167.64,4.127 167.64,8.89 167.64,9.525 162.555,14.61 ; 162.555,14.61 162.56,14.605 ; 162.555,14.61 162.56,14.605
D4: BUS1.36 U1.29 | length 52.9
  Front w0.368: U1.29@154.031,47.434 156.21,47.434 158.305,47.434 161.925,43.815 161.925,23.495 163.195,22.225 163.195,15.24 168.91,9.525 169.545,9.525 170.18,8.89 BUS1.36@170.18,4.127
D5: BUS1.35 U1.30 | length 55.9
  Front w0.368: U1.30@154.031,48.085 156.845,48.085 158.613,48.085 162.563,44.135 162.563,23.812 163.83,22.545 163.83,15.875 169.545,10.16 172.09,10.16 172.72,9.53 BUS1.35@172.72,4.127
D6: BUS1.34 U1.31 | length 58.5
  Front w0.368: U1.31@154.031,48.735 157.48,48.735 158.91,48.735 163.195,44.45 163.195,24.13 164.465,22.86 164.465,16.51 ; BUS1.34@175.26,4.127 175.26,9.525 173.99,10.795 170.18,10.795 164.46,16.515 ; 164.46,16.515 164.465,16.51 ; 164.46,16.515 164.465,16.51
D7: BUS1.33 U1.32 | length 66.6
  Front w0.368: U1.32@154.031,49.385 158.115,49.385 159.276,49.385 163.862,44.799 163.862,24.416 165.1,23.177 165.1,17.018 169.418,12.7 169.545,12.7 174.625,12.7 177.8,9.525 ; 177.8,9.525 BUS1.33@177.8,4.127 177.8,9.525
G: FB2.1 R12.1 U1.3 | length 51.9
  Front w0.368: 151.13,30.797 151.392,30.536 U1.3@154.031,30.536
  Front w0.505: 147.637,42.862 v1(147.637,50.165)
  Front w0.508: 147.637,42.862 149.225,41.275 149.225,33.02 149.225,32.703 151.13,30.797
  Back w0.508: v1(147.637,50.165) 165.735,50.165 FB2.1@170.18,54.61 171.45,55.88 R12.1@171.45,57.785